# Altium PCB ToF.PcbDoc
Units mil, origin at the board's own origin, x right, y up, seen from the top; angles counter-clockwise.
Board outline 1740 x 1740 mil, 2 copper layers (Top Layer, Bottom Layer); 23 components, 22 nets, 125 pads, 32 vias.
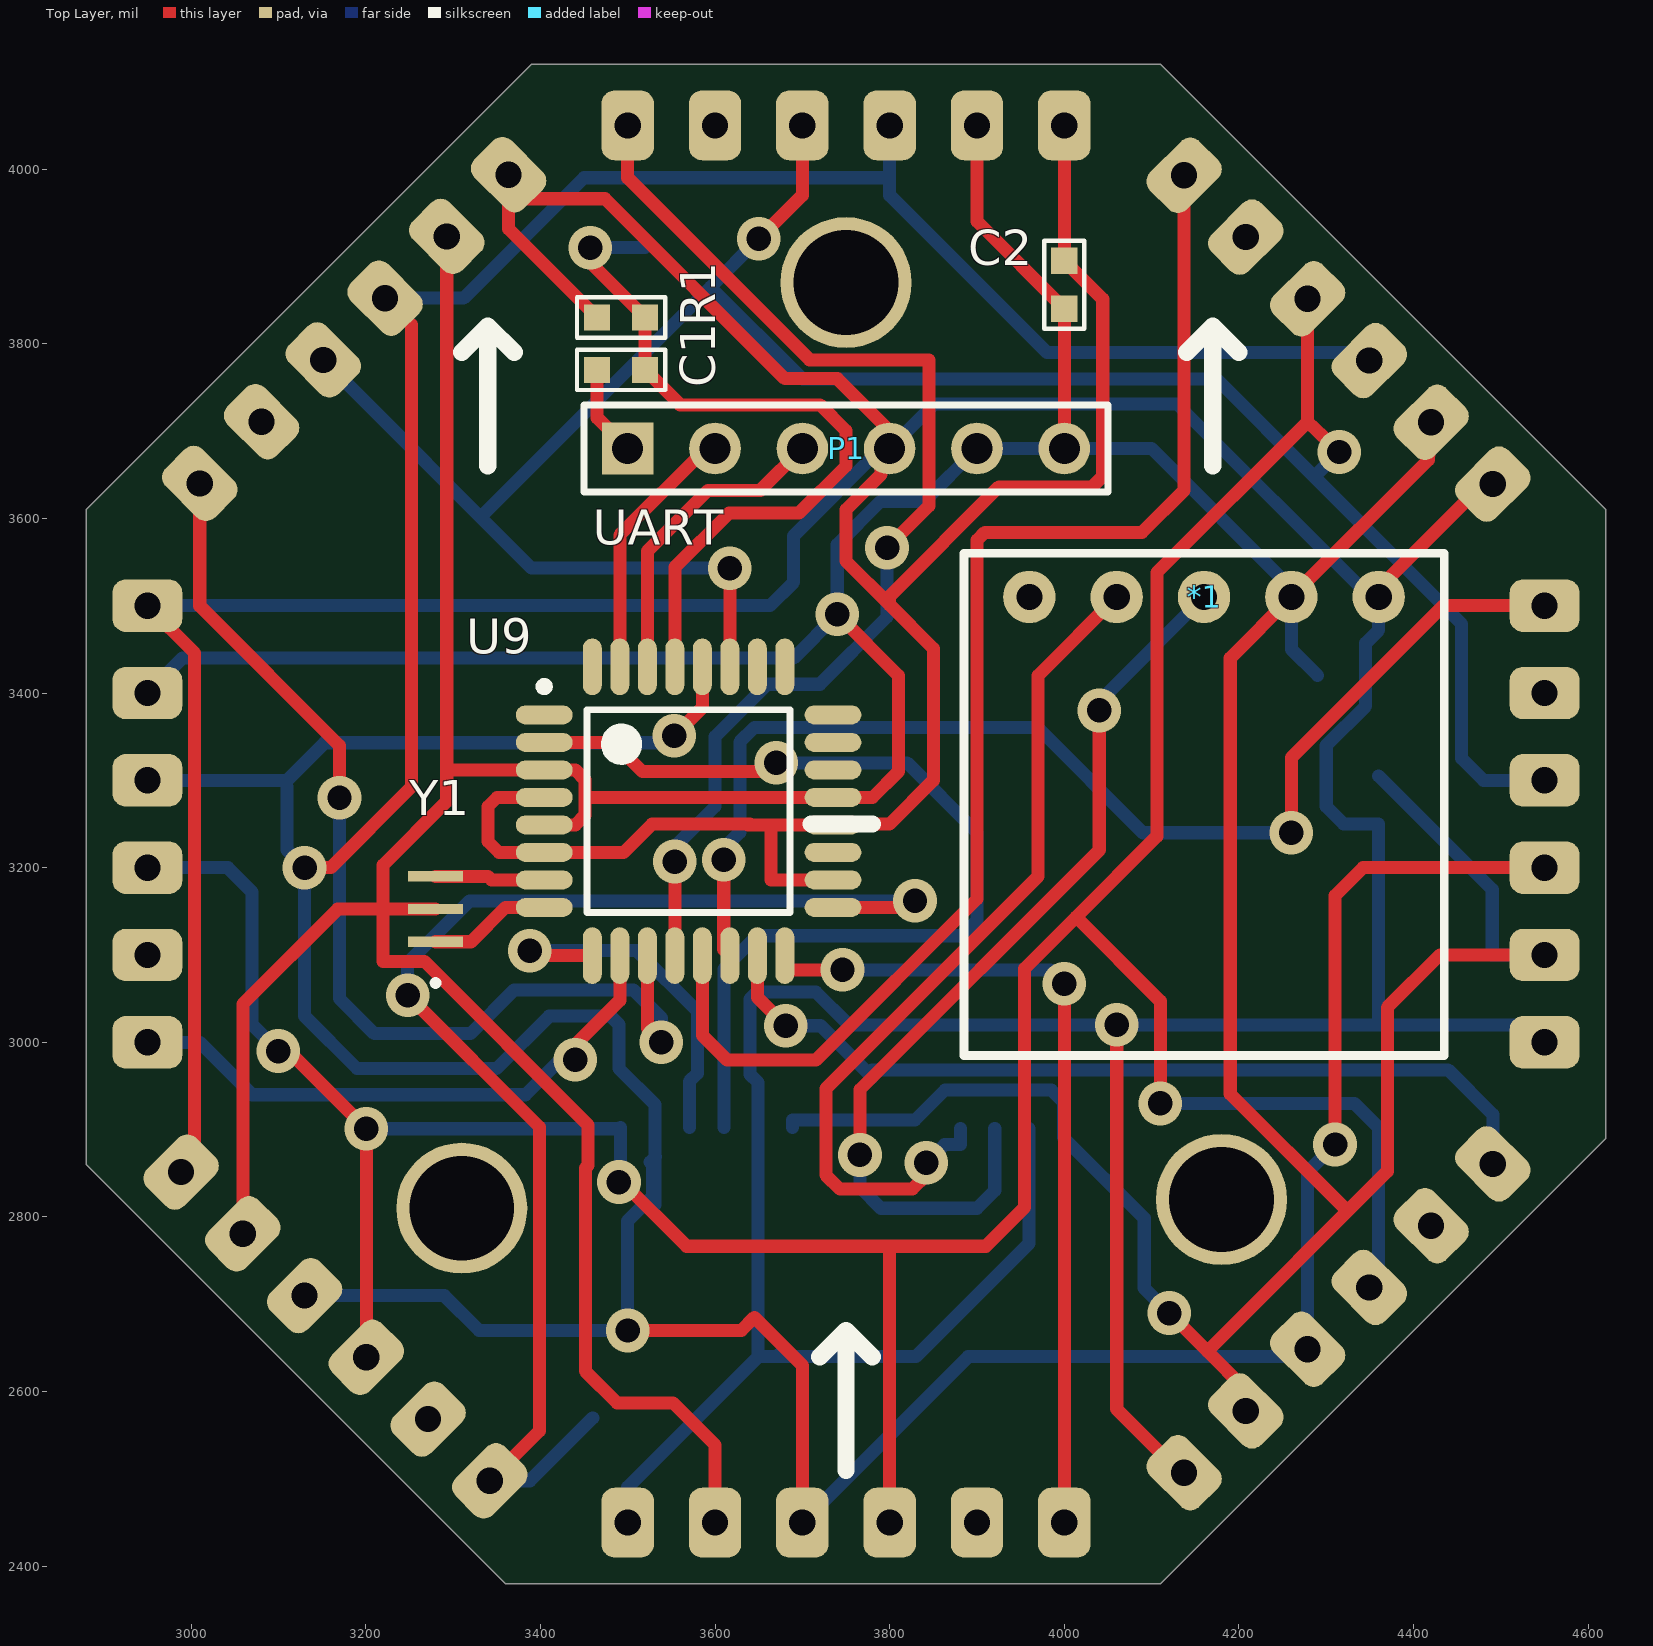
[diagram p0: Top Layer view]
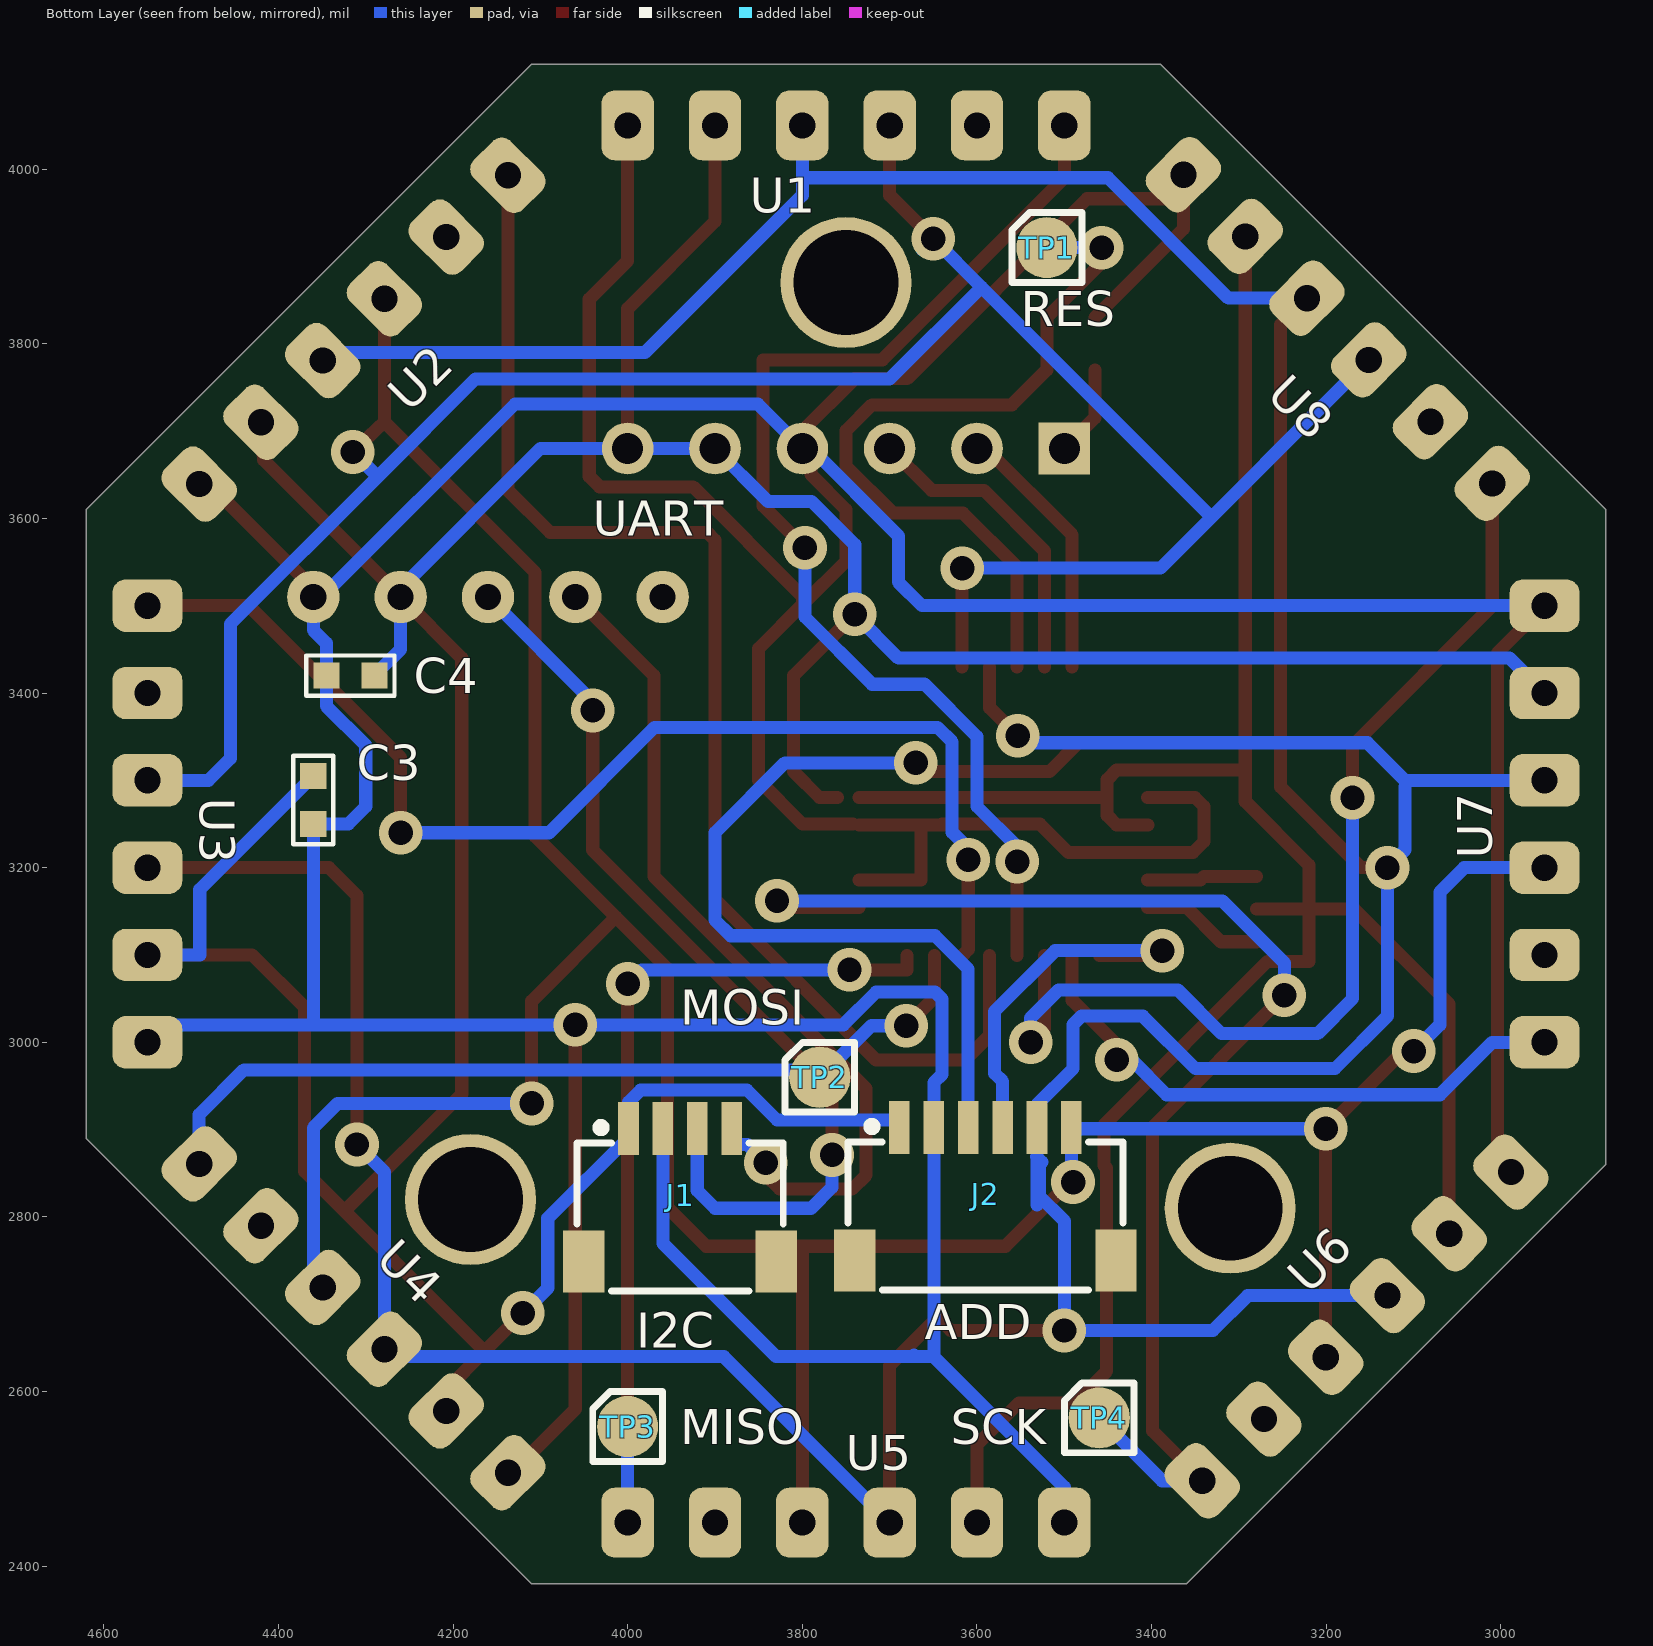
[diagram p1: Bottom Layer view, seen from below]

## Layer stack, top to bottom
Top Solder: solder mask 0.4, Solder Resist, Dk 3.5
Top Layer: signal copper 1.4
Dielectric 1: dielectric 12.6, FR-4, Dk 4.8
Bottom Layer: signal copper 1.4
Bottom Solder: solder mask 0.4, Solder Resist, Dk 3.5

## Board outline
4110,2380 3360,2380 2880,2860 2880,3610 3390,4120 4110,4120 4620,3610 4620,2890

## Design rules (kind name [scope] priority, off if disabled: settings)
Clearance [All] p1: gap=6
PolygonConnect [All] p1: connectstyle=Relief reliefconductorwidth=10 reliefentries=4 polygonreliefangle="90 Angle" airgapwidth=10
RoomDefinition Tof [InComponentClass('Tof')] p1: confinementstyle=ConfineIn formatcopy=TRUE lockcomponents=FALSE outline 2795,2275 4700,2275 4700,4200 2795,4200
RoutingVias [All] p1: holewidth=28 width=50 viastyle="Through Hole" minholewidth=28 minwidth=50 maxholewidth=28 maxwidth=50
SolderMaskExpansion [All] p1: expansion=4
Width [All] p1: maxlimit=25 minlimit=10 preferedwidth=15
30 further rules are at their usual default settings.

## Components (designator, comment, footprint, x,y, rotation, side; value= is the part's Value field where it differs from the comment)
*1 "GY-271" GY-271 4360,3510 r0 top
C1 "100nF" 0603C-GENERIC 3465,3770 r0 top
C2 "100nF" 0603C-GENERIC 4000,3895 r270 top
C3 "100nF" 0603C-GENERIC 4360,3250 r90 bottom
C4 "100nF" 0603C-GENERIC 4345,3420 r180 bottom
J1 "665104131822" 665104131822 3940,2800 r180 bottom
J2 "665106131822" 665106131822 3590.39,2801.18 r180 bottom
P1 "UART" HDR1X6 3500,3680 r0 top
R1 "10K" 0603R-10K 3520,3830 r180 top
TP1 "RES" TESTPIN 3520,3910 r180 bottom
TP2 "MOSI" TESTPIN 3780,2960 r180 bottom
TP3 "MISO" TESTPIN 4000,2560 r180 bottom
TP4 "SCK" TESTPIN 3460,2570 r180 bottom
U1 "devVL53L1X" TOF4 4000,4050 r90 bottom
U2 "devVL53L1X" TOF4 4490.71,3639.29 r45 bottom
U3 "devVL53L1X" TOF4 4550,3000 r0 bottom
U4 "devVL53L1X" TOF4 4137.16,2507.16 r315 bottom
U5 "devVL53L1X" TOF4 3500,2450 r270 bottom
U6 "devVL53L1X" TOF4 2988.58,2851.42 r225 bottom
U7 "devVL53L1X" TOF4 2950,3500 r180 bottom
U8 "devVL53L1X" TOF4 3363.55,3993.55 r135 bottom
U9 "ATmega328P-AU" 32A_N 3569.76,3264.65 r0 top
Y1 "CSTCE16M0V53-R0" OSC_CSTCE16M0V53-R0 3280,3152.6 r90 top

## Footprints (in the part's own frame and the unit in brackets; to place one, negate y for a bottom-side part, rotate by r counter-clockwise, add the part's x,y. Pads: shape width x height; smd on the part's side, far side on the other; paste and mask are expansions set on the pad)
32A_N [mm] "Thin QFP, 32-Leads, Body 7x7mm, Pitch 0.8mm, IPC Medium Density"
  oval 1.65x0.55 smd: 1(-4.2,2.8) 2(-4.2,2) 3(-4.2,1.2) 4(-4.2,0.4) 5(-4.2,-0.4) 6(-4.2,-1.2) 7(-4.2,-2) 8(-4.2,-2.8) 17(4.2,-2.8) 18(4.2,-2) 19(4.2,-1.2) 20(4.2,-0.4) 21(4.2,0.4) 22(4.2,1.2) 23(4.2,2) 24(4.2,2.8)
  oval 0.55x1.65 smd: 9(-2.8,-4.2) 10(-2,-4.2) 11(-1.2,-4.2) 12(-0.4,-4.2) 13(0.4,-4.2) 14(1.2,-4.2) 15(2,-4.2) 16(2.8,-4.2) 25(2.8,4.2) 26(2,4.2) 27(1.2,4.2) 28(0.4,4.2) 29(-0.4,4.2) 30(-1.2,4.2) 31(-2,4.2) 32(-2.8,4.2)
  silkscreen extent -4.32,-2.95 2.95,3.75, body extent -3.5,-3.5 3.5,3.5, height 1.2
0603C-GENERIC [mil] "CAPACITOR 0603"
  rect 30x30 smd: 1(0,0) 2(55,0)
  silkscreen extent -23,-23 78,23, body extent -4,-15 59,15, height 19
0603R-10K [mil] "RESISTOR 0603"
  rect 30x30 smd: 1(0,0) 2(55,0)
  silkscreen extent -23,-23 78,23, body extent -4,-15 59,15, height 20
665104131822 [mm] "1.00 mm SMT Male Horizontal Shrouded, 4p"
  rect 0.6x1.55 smd: 1(-1.5,2.575) 2(-0.5,2.575) 3(0.5,2.575) 4(1.5,2.575)
  rect 1.2x1.8 smd: M1(-2.8,-1.3) M2(2.8,-1.3)
  silkscreen extent -3,-2.15 3,2.7, body extent -3,-2.1 3,2.85, height 2.97
665106131822 [mm] "1.00 mm SMT Male Horizontal Shrouded, 6p"
  rect 0.6x1.55 smd: 1(-2.5,2.575) 2(-1.5,2.575) 3(-0.5,2.575) 4(0.5,2.575) 5(1.5,2.575) 6(2.5,2.575)
  rect 1.2x1.8 smd: M1(-3.8,-1.3) M2(3.8,-1.3)
  silkscreen extent -4,-2.15 4,2.7, body extent -4,-2.1 4,2.85, height 2.97
GY-271 [mil]
  round 60 hole 30: 1(0,0) 2(-100,0) 3(-200,0) 4(-300,0) 5(-400,0)
  silkscreen extent -475,-525 75,50
HDR1X6 [mm] "Connector; Header; 6 Position"
  rect 1.5x1.5 hole 0.9: 1(0,0)
  round 1.5 hole 0.9: 2(2.54,0) 3(5.08,0) 4(7.62,0) 5(10.16,0) 6(12.7,0)
  silkscreen extent -1.27,-1.27 13.97,1.27
OSC_CSTCE16M0V53-R0 [mm]
  rect 0.3x1.6 smd: 1(-0.95,0) 2(0,0) 3(0.95,0)
  silkscreen extent -2.22,-0.07 -2.08,0.07
TESTPIN [mil]
  round 70 smd: 1(0,0)
  silkscreen extent -40,-40 40,40, body extent -40,-40 40,40, height 470
TOF4 [mil]
  rrect50% 80x60 hole 30: 1(0,0) 2(0,-100) 3(0,-200) 4(0,-300) 5(0,-400) 6(0,-500)
  Mechanical 1 keep-out lines w10: 0,-560 0,60 70,60 70,-560 0,-560

## Part data
C1 C2 C3 C4: library part 0603C-100NF-25V-X7R-TDK, "CAPACITOR 0603 CERAMIC"
J1: "WR-WTB 1.00 mm SMT Male Horizontal Shrouded, 4p"
J2: "WR-WTB 1.00 mm SMT Male Horizontal Shrouded, 6p"
P1: library part "Header 6", "Header, 6-Pin"
R1: library part 0603R-10K, "GENERIC RESISTOR 0603"
TP1 TP2 TP3 TP4: library part TESTPIN, "TESTPIN SINGLE PIN HEADER"
U1 U2 U3 U4 U5 U6 U7 U8: "ToF sensor"
U9: "8-bit AVR Microcontroller, 32KB Flash, 1KB EEPROM, 2KB SRAM, 32-pin TQFP, Industrial Grade (-40°C to 85°C)"
Y1: "Ceramic Resonator 16MHz ??0.5% _Tol_ ??0.3% _Stability_ 15pF 40Ohm 3-Pin CSMD T/R"

## Free pads (board coordinates)
  round 150 hole 120: 2(3310,2810) 2(3750,3870) 2(4180,2820)

## Via types
v1: diameter 50, hole 28, Top Layer to Bottom Layer, 32 vias

## Nets (pads, with @x,y where several pads share a name; then routed paths per layer and width w, separated by ;. In a path a pad name is that pad's centre, name@x,y a point inside that pad or via, vN(x,y) a via of type N, cw(c..) or ccw(c..) an arc to the next point about the centre after c; other vN are vias at no path point)
GND: *1.2 C2.2 C3.2 C4.2 J1.1 J2.1 P1.5 P1.6 U1.2 U2.2 U3.2 U4.2 U5.2 U6.2 U7.2 U8.2 U9.3 U9.5 U9.21 Y1.2 | length 7962.1
  Top Layer w15: U6.2 3059.29,3043.89 3168,3152.6 3220,3152.6 ; Y1.2 3220,3152.6 ; U8.2 3292.84,3307.16 ; U9.5 3440,3248.9 3451,3259.9 3451,3280.39 ; U5.2 3600,2539 3552,2587 3488,2587 3451.5,2623.5 3451.5,2855.95 3454.5,2858.95 3454.5,2905.5 3267.5,3092.5 3220,3092.5 3220,3152.6 ; U9.21 3451,3280.39 ; v1(3740,3490) 3810,3420 3810,3310 3780.36,3280.36 U9.21@3759.64,3280.36 ; U1.2 3900,3940 C2.2 P1.6 ; v1(4120,2690) 4163.93,2646.07 ; U4.2 4207.87,2602.13 4163.93,2646.07 ; 4320.43,2810.43 4190,2940.87 4190,3440 *1.2 4417,3667 U2.2 ; U3.2 4430,3100 4370,3040 4370,2852.13 4163.93,2646.07 ; 3220,3152.6 3220,3203 3292.84,3275.84 3292.84,3307.16 ; 3292.84,3307.16 3297.58,3311.89 U9.3 3440,3311.89 3451,3300.89 3451,3280.39
  Bottom Layer w15: U7.2 2990,3440 3690,3440 v1(3740,3490) 3740,3570 3789.5,3619.5 3839.5,3619.5 P1.5 P1.6 4100,3680 4260,3520 *1.2 4260,3450 C4.2 ; J2.1 3688.82,2911 3829,2911 3863.39,2945.39 3985,2945.39 3999.05,2931.34 J1.1 3999.05,2890.95 4091.5,2798.5 4091.5,2718.5 v1(4120,2690) ; C3.2 4490,3175 4490,3100 U3.2
Net*1_3: *1.3 J1.3 | length 1082.9
  Top Layer w15: v1(3766,2871) 3766,2946 4040,3220 v1(4040,3380)
  Bottom Layer w15: v1(3766,2871) 3766,2834 3790,2810 3900,2810 3920.31,2830.31 J1.3 ; v1(4040,3380) 4040,3390 *1.3
Net*1_4: *1.4 J1.4 | length 1008.2
  Top Layer w15: v1(3842,2862) 3842,2848 3826,2832 3743,2832 3727,2848 3727,2947 3970,3190 3970,3420 *1.4
  Bottom Layer w15: v1(3842,2862) 3863,2883 3880.94,2883 J1.4
NetC1_1: C1.1 P1.1 | length 104.5
  Top Layer w15: C1.1 3465,3715 P1.1
NetC1_2: C1.2 R1.1 TP1.1 U9.29 | length 886.3
  Top Layer w15: v1(3457,3910) 3457,3893 R1.1 C1.2 3560,3730 3720.3,3730 3750,3700.3 3750,3660 3696,3606 3616,3606 3554.02,3544.02 U9.29
  Bottom Layer w15: v1(3457,3910) TP1.1
NetJ2_3: J2.3 U9.2 | length 1155.4
  Top Layer w15: U9.2 3483.61,3343.39 3517,3310 3655,3310 3665,3320 v1(3670,3320)
  Bottom Layer w15: J2.3 3610.08,3084 3648.08,3122 3882,3122 3900,3140 3900,3240 3820,3320 3690,3320 3680,3330 3680,3320 v1(3670,3320)
NetJ2_4: J2.4 U9.9 | length 431.5
  Top Layer w15: v1(3388,3105) 3393.71,3099.29 U9.9
  Bottom Layer w15: v1(3388,3105) 3510.52,3105 3580,3035.52 3580,2964.48 3570.71,2955.19 J2.4
NetJ2_5: J2.5 U1.3 U2.3 U3.3 U4.3 U5.3 U6.3 U7.3 U8.3 U9.28 | length 6158.7
  Top Layer w15: v1(3130,3200) 3160,3200 3252.44,3292.44 3252.44,3821.82 U8.3 ; v1(3500,2670) 3630,2670 3645,2685 3700,2630 U5.3 ; v1(3553.51,3351) 3585.51,3383 U9.28 ; v1(4310,2883) 4310,3168 4342,3200 U3.3
  Bottom Layer w15: U7.3 3110,3300 3153,3343 3545.51,3343 v1(3553.51,3351) ; 3110,3293 3110,3220 v1(3130,3200) 3130,3030 3190,2970 3350,2970 3410,3030 3480.5,3030 3490,3020.5 3490,2970 3531.34,2928.66 J2.5 3531.34,2869.66 ; U6.3 3290,2710 3330,2670 v1(3500,2670) 3500,2795.55 3528.5,2824.05 3528.5,2859.95 3525.72,2862.72 3531.34,2868.34 ; U8.3 3312.13,3852.13 3450,3990 3800,3990 ; 3531.5,2814 3531.5,2854.6 3531.34,2854.76 3531.34,2868.34 ; U5.3 3890,2640 4270,2640 U4.3 4278.58,2851.58 v1(4310,2883) ; U1.3 3800,3990 ; U2.3 4340,3790 3980,3790 3800,3970 3800,3990 ; 3531.34,2868.34 3531.34,2869.66 ; 3531.34,2868.34 3532,2869 3531.34,2869.66
NetJ2_6: J2.6 U1.4 U2.4 U3.4 U4.4 U5.4 U6.4 U7.4 U8.4 U9.27 | length 6448
  Top Layer w15: v1(3100,2990) 3111.71,2990 v1(3200.71,2901) U6.4 ; v1(3490,2840) 3494,2840 3567.51,2766.49 3800,2766.49 ; U9.27 v1(3617.01,3543.01) ; v1(3650,3920) 3700,3970 U1.4 ; U5.4 3800,2766.49 ; v1(4110,2930) 4110,3047 4013.5,3143.5 ; U2.4 4278.58,3710.58 ; v1(4315,3676) 4278.58,3710.58 ; 3800,2766.49 3910,2766.49 3954.51,2811 3954.51,3084.51 4013.5,3143.5 ; 4013.5,3143.5 4106,3236 4106,3538 4278.58,3710.58
  Bottom Layer w15: U7.4 3042,3200 3070,3172 3070,3020 v1(3100,2990) ; U8.4 3389.84,3543.01 v1(3617.01,3543.01) ; v1(3200.71,2901) J2.6@3491.97,2901 ; 3335,3605 3594.86,3864.86 ; v1(3490,2840) 3491.97,2841.97 J2.6@3491.97,2901 ; J2.6 J2.6@3491.97,2901 ; v1@3662.42,3907.58 v1(3650,3920) 3594.86,3864.86 ; v1(4110,2930) 4332,2930 4360,2902 4360,2730 U4.4 ; v1(4315,3676) 4287,3648 4287,3647 ; U3.4 4480,3300 4455,3325 4455,3479 4287,3647 ; 3594.86,3864.86 3700,3759.71 4174.29,3759.71 4287,3647
NetP1_2: P1.2 U9.31 | length 301
  Top Layer w15: U9.31 3491.02,3581.02 3590,3680 P1.2
NetP1_3: P1.3 U9.30 | length 358.7
  Top Layer w15: U9.30 3522.52,3562.52 3592,3632 3652,3632 P1.3
NetTP2_1: TP2.1 U4.6 U9.15 | length 1005.7
  Top Layer w15: U9.15 3648.5,3051.5 v1(3681,3019)
  Bottom Layer w15: v1(3681,3019) 3721,3019 TP2.1 ; TP2.1@3780,2968.5 4439.5,2968.5 4490.71,2917.29 U4.6
NetTP3_1: TP3.1 U5.6 U9.16 | length 1069.9
  Top Layer w15: U9.16 3680,3083 v1(3746,3083) ; U5.6 v1(4000,3067)
  Bottom Layer w15: v1(3746,3083) 3984,3083 v1(4000,3067) ; U5.6 TP3.1
NetTP4_1: TP4.1 U6.6 U9.17 | length 1538.9
  Top Layer w15: v1(3248,3054) 3399,2903 3399,2555 3342.13,2498.13 U6.6 ; U9.17 3829,3154.41 v1(3829,3162)
  Bottom Layer w15: v1(3248,3054) 3248,3091 3319,3162 v1(3829,3162) ; U6.6 3387.87,2497.87 TP4.1
NetU1_6: U1.6 U9.12 | length 1329.2
  Top Layer w15: U1.6 3500,3990 3708.5,3781.5 3845,3781.5 3845,3614.24 v1(3797,3566.24) ; U9.12 v1(3554.02,3207.02)
  Bottom Layer w15: v1(3554.02,3207.02) 3554.02,3224.02 3600,3270 3600,3350 3660,3410 3720,3410 3797,3487 v1(3797,3566.24)
NetU2_6: U2.6 U9.13 | length 1526.2
  Top Layer w15: U9.13 3585.51,3008 3613.66,2979.85 3715.73,2979.85 3900,3164.12 3900,3575 3909,3584 4089,3584 4137.16,3632.16 U2.6
NetU3_6: U3.6 U9.14 | length 1391.6
  Top Layer w15: v1(3610.02,3209.15) 3610.02,3106.29 U9.14 ; v1(4260,3240) 4260,3326 4434,3500 U3.6
  Bottom Layer w15: v1(3610.02,3209.15) 3610.02,3222.01 3628.5,3240.49 3628.5,3344 3645,3360.5 3969.5,3360.5 4090,3240 v1(4260,3240)
NetU7_6: U7.6 U9.10 | length 671.8
  Top Layer w15: v1(3440,2980) 3440,2997 3491.02,3048.02 U9.10
  Bottom Layer w15: U7.6 3010,3000 3070,2940 3383,2940 3423,2980 v1(3440,2980)
NetU8_6: U8.6 U9.11 | length 1209.2
  Top Layer w15: U8.6 3010,3499.79 3170,3339.79 v1(3170,3280) ; U9.11 3522.52,3016 v1(3538.52,3000)
  Bottom Layer w15: v1(3170,3280) 3170,3050 3210,3010 3320,3010 3370,3060 3506.5,3060 3538.52,3027.98 v1(3538.52,3000)
NetU9_7: U9.7 Y1.3 | length 126.1
  Top Layer w15: Y1.3 3340,3190 3344.09,3185.91 U9.7
NetU9_8: U9.8 Y1.1 | length 140.7
  Top Layer w15: Y1.1 3320.7,3115.2 3359.91,3154.41 U9.8
VCC: *1.1 C2.1 C3.1 C4.1 J1.2 J2.2 P1.4 R1.2 U1.1 U2.1 U3.1 U4.1 U5.1 U6.1 U7.1 U8.1 U9.4 U9.6 U9.18 U9.20 | length 8476.9
  Top Layer w15: U7.1 3004,3446 3004,2866.84 U6.1 ; U8.1@3350,4000 U8.1@3363.55,3986.45 ; U8.1 U8.1@3363.55,3986.45 ; U9.4 3350.39,3280.39 3340,3270 3340,3230 3352.6,3217.4 U9.6 3495.4,3217.4 3528,3250 3639.81,3250 ; R1.2 3363.55,3931.45 U8.1@3363.55,3986.45 ; 3637.9,3248.9 3664.09,3248.9 ; U9.18 3664.09,3185.91 3664.09,3248.9 ; U9.20 3664.09,3248.9 ; U9.20@3742.29,3250 3800,3250 3850,3300 3850,3451 3800,3501 ; U1.1 C2.1 4044,3851 4044,3648 4032,3636 3925,3636 3800,3511 3800,3501 ; v1(4060,3020) 4060,2580 4132.84,2507.16 U4.1 ; *1.1 4360,3520 4479.29,3639.29 U2.1 ; U8.1@3363.55,3986.45 3384,3966 3474,3966 3680,3760 3740,3760 3800,3700 P1.4 3790,3670 3790,3650 3750,3610 3750,3551 3800,3501
  Bottom Layer w15: U7.1 3663,3500 3690,3527 3690,3580 3790,3680 P1.4 3851,3731 4129,3731 4350,3510 *1.1 4360,3472 4345,3457 C4.1 4345,3385 4300,3340 4300,3270 4320,3250 C3.1 4360,3020 ; U5.1 3500,2490.55 3649.45,2640 ; 3672,2642 3670,2640 ; J1.2 3959.69,2769.69 3830,2640 3670,2640 ; U3.1 4530,3020 4360,3020 ; 3649.45,2640 3670,2640 ; 3649.45,2640 J2.2 3649.45,2954 3640,2963.45 3640,3049.5 3648,3057.5 3715.67,3057.5 3753.17,3020 v1(4060,3020) 4060,3013 4067,3020 4360,3020
pads on no net: *1.5 J1.M1 J1.M2 J2.M1 J2.M2 U1.5 U2.5 U3.5 U4.5 U5.5 U6.5 U7.5 U8.5 U9.1 U9.19 U9.22 U9.23 U9.24 U9.25 U9.26 U9.32

## Silkscreen, mask and mechanical layers (free items; w line width, h text height)
Top Overlay:
  lines w20: 3310,3790 3340,3820 ; 3340,3660 3340,3820 ; 3370,3790 3340,3820 ; 3710,3250 3780,3250 ; 3720,2640 3750,2670 ; 3750,2510 3750,2670 ; 3780,2640 3750,2670 ; 4140,3790 4170,3820 ; 4170,3660 4170,3820 ; 4200,3790 4170,3820
Bottom Overlay:
  text "UART" at 4040,3580 h40
  text "ADD" at 3660,2660 h40
  text "I2C" at 3990,2650 h40
Mechanical 13:
  lines w10: 2880,3590 2880,3610 3390,4120 4110,4120 4620,3610 4620,2890 4110,2380 3360,2380 2880,2860 2880,3600